# Altium PCB PCB1.PcbDoc (part 2 of 4)
Units mm, origin at the board's own origin, x right, y up, seen from the top; angles counter-clockwise.
Board outline 125 x 60 mm, 4 copper layers (Top Copper, Top Ref, Botton Ref, Bottom Copper), stack 1.586 mm thick; 166 components, 89 nets, 449 pads, 336 vias.
Unrouted connection lines stored in the file: 10.
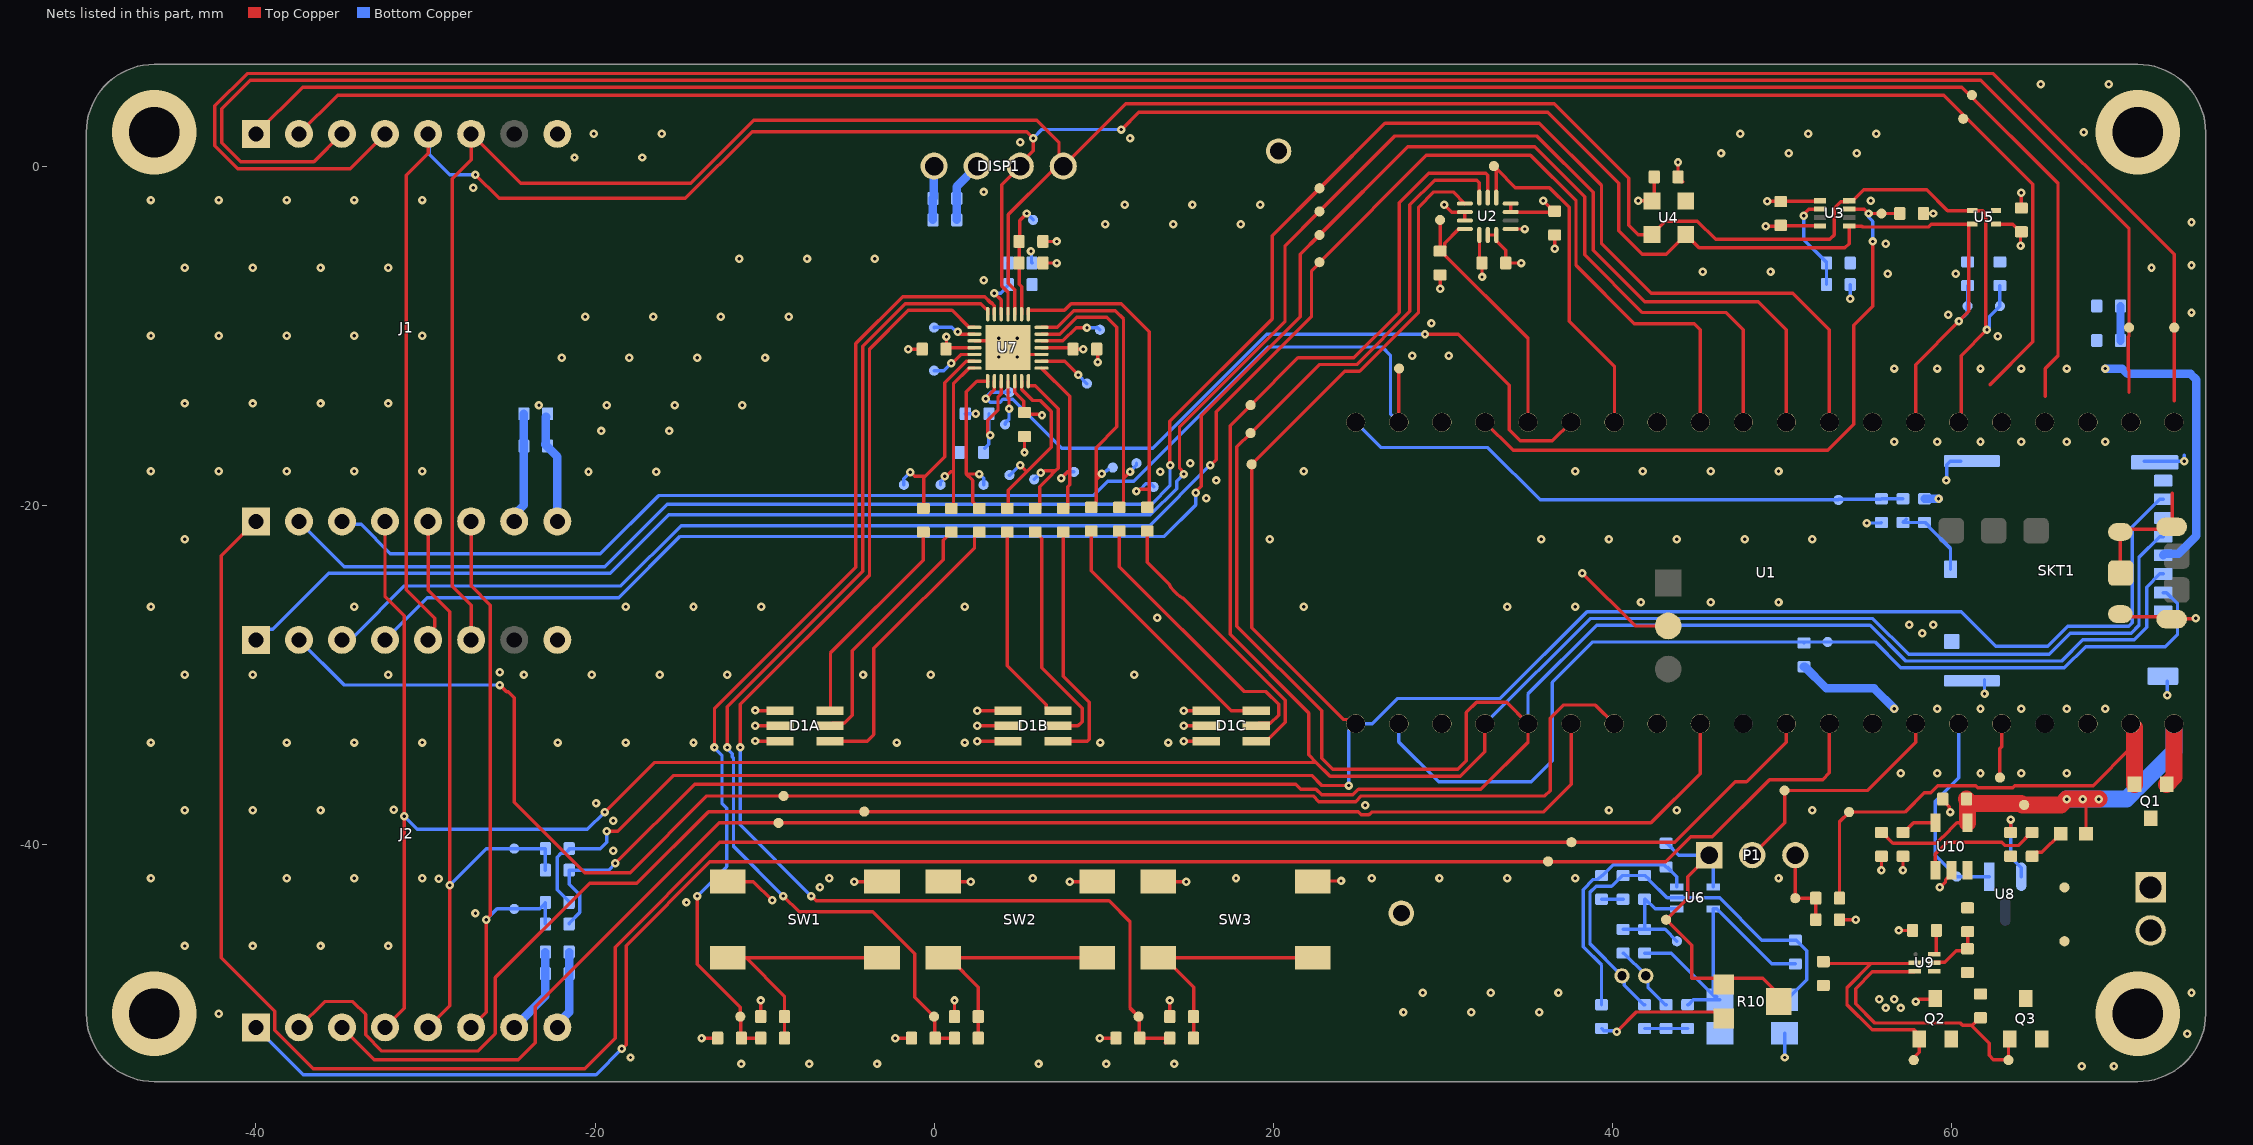
[diagram p4: the nets of this part, all layers, seen from the top]

## Part data
+3V3 ADC1 ADC2 ADC3 AMP_IN BTN1 BTN2 BTN3 COUT CS1 CS2 DOUT ICS IINT INT1 INT2 IO3 IO4 IO11 IO12 LB1 LB2 LB3 LG1 LG2 LG3 LR1 LR2 LR3 MB_MISO MB_MOSI MISO MOSI MOUT OINT OSCIO PWM1 PWM2 RST1 RST2 RX1 RX2 SCK SCL SCS SDA SINT SW SX_RST TX1 TX2 VBAT+ VBAT- VBUS VREF VSYS VSYSM: library part CMP-00028-00002-2, "0.6mm round", Pins=1
C1 C2 C3 C4 C5 C6 C7 C8 C11 C12 C13 C14 C15 C16 C17 C18 C19 C20 C21 C22 C23 C25 C26 C27: library part CMP-001-00085-1, "Multilayer Ceramic Capacitor, 0.1 uF, 16 V, ± 20%, X7R, 0603 [1608 Metric]", Case Code (Imperial)=0603, Case Code (Metric)=1608, Dielectric=X7R, Dielectric Material=Tantalum, Max Operating Temperature=125°C, Min Operating Temperature=-55°C, Package Quantity=4000, Tolerance=20%, Voltage Rating=16V, Case/Package=0603, Construction=Flat, Depth=0.8mm, Height=0.95mm, Lead Free="Lead Free", Length=1.6mm, Mounting Technology="Surface Mount", Packaging="Tape and Reel", RoHS Compliant=Yes, Series=VJ, Termination=SMD/SMT, Voltage Rating (DC)=16V, Width=0.8mm
C9: library part CMP-001-00088-1, "Multilayer Ceramic Capacitor, 100 pF, 50 V, ï¿½ 10%, C0G (NP0), 0603 [1608 Metric]", Case Code (Imperial)=0603, Case Code (Metric)=1608, Dielectric=C0G, Dielectric Material=Ceramic, Max Operating Temperature=125°C, Min Operating Temperature=-55°C, Package Quantity=1, Temperature Coefficient=30ppm/°C, Tolerance=10%, Voltage Rating=50V, Case/Package=0603, Construction=Flat, Depth=0.8mm, Dissipation Factor=0.1%, Height=0.8mm, Lead Free="Lead Free", Lead Pitch=0.7mm, Length=1.6mm, Material=Ceramic, Mounting Technology="Surface Mount,PCB", Packaging="Tape and Reel", Radiation Hardening=No, Reach SVHC Compliant=No, RoHS Compliant=Yes, Series=C, Termination=SMD/SMT, Thickness=0.034inch, Voltage Rating (DC)=50V, Width=0.031inch
C10: library part CMP-001-00087-1, "Multilayer Ceramic Capacitor, 10 uF, 6.3 V, ± 20%, X5R, 0603 [1608 Metric]", Case Code (Imperial)=0603, Case Code (Metric)=1608, Dielectric=X5R, Max Operating Temperature=85°C, Min Operating Temperature=-55°C, Package Quantity=4000, Tolerance=20%, Voltage Rating=6.3V, Case/Package=0603, Height=0.8mm, Lead Free="Lead Free", Length=1.6mm, Mounting Technology="Surface Mount", Packaging="Cut Tape", RoHS Compliant=Yes, Series=GRM, Termination=Standard, Voltage Rating (DC)=6.3V, Weight=0.000222oz, Width=0.8mm
C24: library part CMP-001-00084-1, "Multilayer Ceramic Capacitor, 0.01 uF, 50 V, ± 10%, X7R, 0603 [1608 Metric]", Case Code (Imperial)=0603, Case Code (Metric)=1608, Dielectric=X7R, Max Operating Temperature=125°C, Min Operating Temperature=-55°C, Package Quantity=1, Tolerance=10%, Voltage=50V, Case/Package=0603, Construction=Flat, Depth=0.8mm, Height=0.92mm, Lead Free="Lead Free", Length=1.6mm, Mounting Technology="Surface Mount", Packaging="Tape and Reel", Pins=2, Reach SVHC Compliant=Unknown, RoHS Compliant=Yes, Series=VJ, Termination=SMD/SMT, Thickness=0.036inch, Voltage Rating=50V, Voltage Rating (DC)=50V, Weight=7.1E-05oz, Width=0.031inch
C28 C29: library part CMP-001-00076-4, "Chip Capacitor, 4.7µF +/-20%, 10V, 0603, Thickness 1 mm", Case/Package=0603, Max Operating Temperature=85°C, Min Operating Temperature=-55°C, Tolerance=10%, Voltage Rating=10V, Mounting Technology=SMT, Pins=2
D1A D1B D1C: library part CMP-007-00036-1, "LED Tri-Color Blue/Green/Red 469nm/529nm/623nm Chip LED 6-Pin PLCC T/R", Case/Package=PLCC, Color=Blue,Green,Red, Forward Current=20mA, Forward Voltage=3.1V, Max Operating Temperature=100°C, Min Operating Temperature=-40°C, Package Quantity=2000, Reverse Voltage=4V, Contact Plating=Silver, Dominant Wavelength=469nm, Height=2mm, Length=3mm, Lens Size=2.3mm, Lens Style=Flat,Square,Diffused,Rectangular, Lens Transparency=Diffused, Luminous Intensity=384mcd, Mounting Technology="Surface Mount", Number of LEDs=3, Orientation="Top View", Packaging="Cut Tape", Pins=6, Reach SVHC Compliant=No, Series=-, Test Current=20mA, Viewing Angle=120°, Weight=40mg, Width=2.8mm
DISP1: library part CMP-003-00030-5, "0.96 Inch I2C OLED Display Module"
DS1: library part CMP-007-00004-2, "Chip LED, Red, 5 V, 25 mA, -40 to 85 degC, 2-Pin SMD (0603), RoHS, Tape and Reel", Case/Package=0603, Colour=Red, Forward Voltage=2.2V, Manufacturer="Everlight Electronics", Package Description="2-Pin Surface Mount Device, Body 1.6 x 0.8 mm", Datasheet URL=https://datasheet.ciiva.com/4688/el-19-217-r6c-al1m2vy-3tpdf-187026-4688713.pdf, Datasheet Version="Rev. 1, 01/2005", Lens Style=Clear, Manufacturer URL=http://www.everlight.com/, Mounting Technology=SM, Package Reference=0603, RoHS Compliant=False
J1 J2: library part CMP-002-00071-3, "MikroBus shield pico"
J3: library part CMP-002-00073-1, "Connector 250V AC/DC 5A 2P 1 Row PCB - Vertical Mounting Polyester White", Color=Beige, Contact Current Rating=5A, Flammability Rating="UL94 V-0", Housing Color=Natural, Max Operating Temperature=221°C, Min Operating Temperature=-67°C, Operating Supply Voltage=250V, Package Quantity=5000, Approvals=CSA, Backwall/Post Interruptions="No (Without)", Circuit Application=Signal, Connector System=Wire-to-Board, Connector Type=Connector,Pin,Plug,Header, Contact Material="Copper Alloy", Contact Mating Length=7.49mm, Contact Plating=Tin, Contact Post Length=3.56mm, Contact Retention="No (Without)", Contact Shape=Square, Contact Style=Straight, Current Rating=5A, Gender=Male, Height=7.87mm, Housing Material=Polyester, Lead Free="Lead Free", Length=7.62mm, Mating Alignment="No (Without)", Mating Connector Lock="Yes (With)", Mating Retention="No (Without)", Mounting Ears="No (Without)", Mounting Technology="Through Hole", Number of Contacts=2, Number of Positions=2, Number of Rows=1, Orientation=Straight, Panel Mount Retention="No (Without)", PCB Mount Alignment="No (Without)", PCB Mount Retention=Without, PCB Mounting Orientation=Vertical, PCB Thickness=0.063inch, Pitch=2.54mm, Plating=Tin, Plating Thickness=3.81um, Reach SVHC Compliant=Unknown, RoHS Compliant=Yes, Sealable="No (Without)", Series=MTA-100, Shrouded="No (Without)", Strain Relief="No (Without)", Tail Length=0.14inch, Termination=Solder, Voltage Rating=250V, Voltage Rating (AC)=250V, Voltage Rating (DC)=250V
L1 L2: library part CMP-006-00000-4, "IND, Chip Ferrite Bead, 330 Ohm, +/- 25%, 1.5 A, -55 to 125 degC, 0805 (2012 Metric), Tape and Reel", Case/Package=0805, Current Rating=1.5A, Manufacturer=Murata, Max Operating Temperature=125°C, Min Operating Temperature=-55°C, Package Description="2-Pin Surface Mount Device, Body 2 x1.25 mm", Package Quantity=4000, Resistance=90mohm, Tolerance=25%, Core Material=Ferrite, Datasheet URL=http://psearch.en.murata.com/inductor/product/LQG15HS15NJ02_.pdf, Datasheet Version=Nov-11, Impedance=330Ohm, Max Current Rating=1.5A, Mounting Technology=SM, Package Reference=0805, Packaging=TapeandReel, RoHS Compliant=True
MK1: library part CMP-010-000001-2, "4.0 mm, Omnidirectional, PCB Mount, 2.0 Vdc, Elecret Condenser Microphone", Clock Frequency=10kHz, Frequency=100Hz, Operating Supply Current=500uA, Operating Supply Voltage=2V, Package=None, Availability=Unavailable, Component Type=Standard, Design Item ID=CMEJ-0415-42-LP, Direction=Omnidirectional, Height=1.5mm, Length=4mm, MF="{'manufacturer': u'CUI'}", MP=CMEJ-0415-42-LP, Output Type=Analog, Pin Count=2, Price=None, Series=CMEJ, Shape=Circular, Source=CMEJ-0415-42-LP.SchLib, Termination="PC Pins", Voltage Rating=2V, Width=4mm
P1: library part CMP-002-00076-1, "KK 254 Breakaway Header Vertical 3 Circuits 0.38um Gold Selective Plating Mating Pin 6.09mm", Color=Black, Contact Resistance=20mR, Current Rating=4A, Flammability Rating="UL94 V-0", Max Operating Temperature=75°C, Max Voltage Rating (AC)=250V, Min Operating Temperature=0°C, Package Quantity=1, Contact Material=Brass,Bronze, Contact Mating Length=0.24inch, Contact Plating=Gold, Contact Type="Male Pin", Depth=2.49mm, Gender=Male, Glow Wire Compliant=Non-compliant, Housing Color=Black, Housing Material=Nylon, Lead Free="Lead Free", Max Voltage Rating (DC)=250V, Mounting Technology="Through Hole", Number of Circuits=3, Number of Contacts=3, Number of Positions=3, Number of Rows=1, Orientation=Straight, Packaging=Bulk, Pitch=2.54mm, Radiation Hardening=No, Reach SVHC Compliant=Unknown, RoHS Compliant=Yes, Series="KK® 42375", Termination=Solder, Voltage Rating=250V, Voltage Rating (DC)=250V
Q1: library part CMP-013-00034-1, "NTRV4101PT1G P-channel MOSFET Transistor; 1.7 A; 20 V; 3-Pin SOT-23", Case/Package=SOT-23-3, Continuous Drain Current (ID)=3.2A, Drain to Source Resistance=70mR, Drain to Source Voltage (Vdss)=20V, Gate to Source Voltage (Vgs)=8V, Input Capacitance=675pF, Max Operating Temperature=150°C, Max Power Dissipation=420mW, Min Operating Temperature=-55°C, Package Quantity=3000, Power Dissipation=1.25W, Element Configuration=Single, Fall Time=21ns, Height=1.01mm, Lead Free="Lead Free", Length=3.04mm, Number of Elements=1, Packaging="Tape and Reel", Pins=3, Polarity=P-CHANNEL, Radiation Hardening=No, Rds On Max=85mR, Rise Time=12.6ns, RoHS Compliant=Yes, Series=-, Turn-Off Delay Time=30.2ns, Turn-On Delay Time=7.5ns, Width=1.4mm
Q2 Q3: library part CMP-013-00035-1, "N-Channel 12 V 10 mO 50.6 nC SMT Enhancement Mode Mosfet - SC-59 (SOT-23)", Case/Package=TO-236-3, Continuous Drain Current (ID)=9.3A, Drain to Source Resistance=41mR, Drain to Source Voltage (Vdss)=12V, Gate to Source Voltage (Vgs)=4.5V, Input Capacitance=2.426nF, Max Operating Temperature=150°C, Max Power Dissipation=680mW, Min Operating Temperature=-55°C, Package Quantity=3000, Fall Time=16.8ns, Lead Free="Lead Free", Mounting Technology="Surface Mount", Number of Channels=1, Packaging="Tape and Reel", Polarity=N-CHANNEL, Rds On Max=10mR, Rise Time=57.6ns, RoHS Compliant=Yes, Series=-, Turn-Off Delay Time=22.2ns, Turn-On Delay Time=7.6ns, Weight=0.000282oz
R1 R2 R12 R13 R14 R15 R16 R19 R20 R26 R27 R28 R29 R30 R31 R41: library part CMP-009-00017-7, "Chip Resistor, 10 KOhm, +/- 1%, 01 W, -55 to 155 degC, 0603 (1608 Metric)", Case/Package=0603, Max Operating Temperature=155°C, Min Operating Temperature=-55°C, Power=100mW, Tolerance=1%, Voltage Rating=50V, Mounting Technology=SM, Pins=2, RoHS Compliant=True
R3 R4 R17 R18 R21 R22 R32 R34 R35 R36: library part CMP-009-00006-6, "Chip Resistor, 0 Ohm, 0.1 W, -55 to 155 degC, 0603 (1608 Metric)", Case/Package=0603, Max Operating Temperature=155°C, Min Operating Temperature=-55°C, Power=100mW, Tolerance=5%, Voltage Rating=50V, Mounting Technology=SM, Pins=2, RoHS Compliant=True
R5 R6 R9 R33: library part CMP-009-00014-6, "Chip Resistor, 1 KOhm, +/-1%, 0.1 W, -55 to 155 degC, 0603 (1608 Metric)", Case/Package=0603, Max Operating Temperature=155°C, Min Operating Temperature=-55°C, Power=100mW, Tolerance=1%, Voltage Rating=50V, Mounting Technology=SM, Pins=2, RoHS Compliant=True
R7 R8: library part CMP-009-00023-6, "Chip Resistor, 100 KOhm, +/- 1%, 0.1 W, -55 to 155 degC, 0603 (1608 Metric)", Case/Package=0603, Max Operating Temperature=155°C, Min Operating Temperature=-55°C, Power=100mW, Tolerance=1%, Voltage Rating=50V, Mounting Technology=SM, Pins=2, RoHS Compliant=True
R10: library part CMP-009-00187-1, "Cermet trimmer potentiometer, 100 kΩ, 0.1 W, SMD, on top, TC33X-2-104E", Max Operating Temperature=100°C, Max Power Dissipation=100mW, Min Operating Temperature=-40°C, Package Quantity=1, Resistance Tolerance=25%, Resistor Type=Carbon,Cermet, Temperature Coefficient=250ppm/°C, Voltage Rating (DC)=50V, Depth=3.8mm, Height=0.047inch, Length=0.15inch, Military Standard=Not, Mounting Technology="Surface Mount", Number of Turns=1, Packaging="Tape and Reel", Pins=2, Power Rating=100mW, Radiation Hardening=No, Reach SVHC Compliant=No, RoHS Compliant=Yes, Series=TC33, Termination="Foot Print", Tolerance=25%, Weight=29.4mg, Width=0.118inch
R11 R39: library part CMP-009-00186-1, "SMD Chip Resistor, 2.2 kOhm, ± 1%, 100 mW, 0603 [1608 Metric], Thick Film, General Purpose", Case Code (Imperial)=0603, Case Code (Metric)=1608, Max Operating Temperature=155°C, Max Power Dissipation=100mW, Min Operating Temperature=-55°C, Package Quantity=10, Ratings=AEC-Q200, Resistance Tolerance=1%, Resistor Type="Thick Film", Temperature Coefficient=100ppm/°C, Voltage Rating=75V, Case/Package=0603, Construction=Rectangular, Contact Plating=Tin, Depth=0.85mm, Features="Automotive AEC-Q200", Height=0.45mm, Lead Free="Lead Free", Length=1.55mm, Military Standard=Not, Number of Terminations=2, Packaging="Tape and Reel", Power Rating=100mW, Radiation Hardening=No, Reach SVHC Compliant=Unknown, RoHS Compliant=Yes, Series=CRCW, Technology="THICK FILM", Termination=SMD/SMT, Tolerance=1%, Voltage Rating (DC)=75V, Weight=7.1E-05oz, Width=0.033inch
R23A R23B R23C: library part CMP-009-00189-1, "Res Thick Film 0603 300 Ohm 5% 1/10W ±200ppm/°C Molded SMD Punched Carrier T/R", Case Code (Imperial)=0603, Case Code (Metric)=1608, Max Operating Temperature=155°C, Max Power Dissipation=100mW, Min Operating Temperature=-55°C, Package Quantity=1, Resistance Tolerance=5%, Resistor Type="Thick Film", Temperature Coefficient=200ppm/°C, Voltage Rating=75V, Case/Package=0603, Construction=Rectangular, Contact Plating=Tin, Depth=0.8mm, Features="Automotive AEC-Q200", Height=0.45mm, Lead Free="Lead Free", Length=1.6mm, Military Standard=Not, Mounting Technology="Surface Mount", Number of Terminations=2, Packaging="Tape and Reel", Pins=2, Power Rating=100mW, Radiation Hardening=No, Reach SVHC Compliant=Unknown, RoHS Compliant=Yes, Series=ERJ, Technology="THICK FILM", Termination=SMD/SMT, Tolerance=5%, Voltage Rating (DC)=75V, Weight=7.1E-05oz, Width=0.8mm
R24A R24B R24C R25A R25B R25C: library part CMP-009-00188-1, "SMD Chip Resistor, 100 Ohm, ï¿½ 1%, 100 mW, 0603 [1608 Metric], Thick Film, Precision", Case Code (Imperial)=0603, Case Code (Metric)=1608, Max Operating Temperature=155°C, Max Power Dissipation=100mW, Min Operating Temperature=-55°C, Package Quantity=5000, Resistance Tolerance=1%, Resistor Type="Thick Film", Temperature Coefficient=100ppm/°C, Voltage Rating=75V, Case/Package=0603, Construction=Rectangular, Contact Plating=Tin, Depth=0.8mm, Features="Automotive AEC-Q200", Height=0.45mm, Lead Free="Lead Free", Length=1.6mm, Military Standard=Not, Mounting Technology="Surface Mount", Number of Terminations=2, Packaging="Tape and Reel", Power Rating=100mW, Radiation Hardening=No, Reach SVHC Compliant=No, RoHS Compliant=Yes, Series=ERJ, Termination=SMD/SMT, Tolerance=1%, Voltage Rating (DC)=75V, Weight=7.1E-05oz, Width=0.8mm
R37: library part CMP-009-00184-1, "SMD Chip Resistor, 330 Ohm, ± 1%, 100 mW, 0603 [1608 Metric], Thick Film, Precision", Case Code (Imperial)=0603, Case Code (Metric)=1608, Current Rating=500mA, Max Operating Temperature=155°C, Max Power Dissipation=100mW, Min Operating Temperature=-55°C, Package Quantity=5000, Resistance Tolerance=1%, Resistor Type="Thick Film", Temperature Coefficient=100ppm/°C, Voltage Rating=75V, Case/Package=0603, Construction=Rectangular, Contact Material=Copper, Contact Plating=Tin, Depth=0.8mm, Features="Automotive AEC-Q200", Gender=Male, Height=0.45mm, Lead Free="Lead Free", Lead Pitch=1.1mm, Length=1.6mm, Military Standard=Not, Mounting Technology="Surface Mount", Number of Terminations=2, Packaging="Tape and Reel", Pins=2, Power Rating=100mW, Radiation Hardening=No, Reach SVHC Compliant=No, RoHS Compliant=Yes, Series=ERJ, Termination=SMD/SMT, Tolerance=1%, Voltage Rating (DC)=75V, Weight=7.1E-05oz, Width=0.8mm
R38: library part CMP-009-00182-1, "Res Thick Film 0603 470 Ohm 5% 0.1W(1/10W) ±200ppm/°C Pad SMD Automotive T/R", Case Code (Imperial)=0603, Case Code (Metric)=1608, Max Operating Temperature=155°C, Max Power Dissipation=100mW, Min Operating Temperature=-55°C, Package Quantity=5000, Ratings=AEC-Q200, Resistance Tolerance=5%, Resistor Type="Thick Film", Temperature Coefficient=200ppm/°C, Voltage Rating=75V, Case/Package=0603, Construction=Rectangular, Contact Plating=Tin, Depth=0.85mm, Features="Automotive AEC-Q200", Height=0.45mm, Lead Free="Lead Free", Length=1.55mm, Military Standard=Not, Number of Terminations=2, Packaging="Tape and Reel", Power Rating=100mW, Radiation Hardening=No, Reach SVHC Compliant=Unknown, RoHS Compliant=Yes, Series=CRCW, Technology="THICK FILM", Termination=SMD/SMT, Tolerance=5%, Weight=7.1E-05oz, Width=0.85mm, Working Voltage=75V
R40: library part CMP-009-00181-1, "SMD Chip Resistor, 2 kOhm, ï¿½ 1%, 100 mW, 0603 [1608 Metric], Thick Film, Precision", Case Code (Imperial)=0603, Case Code (Metric)=1608, Max Operating Temperature=155°C, Max Power Dissipation=100mW, Min Operating Temperature=-55°C, Package Quantity=1, Resistance Tolerance=1%, Resistor Type="Thick Film", Temperature Coefficient=100ppm/°C, Voltage Rating=75V, Voltage Rating (DC)=50V, Case/Package=0603, Construction=Rectangular, Contact Plating=Tin, Depth=0.8mm, Features="Automotive AEC-Q200", Height=0.022inch, Lead Free="Lead Free", Length=1.6mm, Military Standard=Not, Mounting Technology="Surface Mount", Number of Terminations=2, Packaging="Tape and Reel", Pins=2, Power Rating=100mW, Radiation Hardening=No, Reach SVHC Compliant=No, RoHS Compliant=Yes, Series=ERJ, Termination=SMD/SMT, Tolerance=1%, Width=0.8mm
R42 R43: library part CMP-009-00185-1, "Res Thick Film 0603 4.7M Ohm 5% 0.1W -400ppm/°C to 150ppm/°C Molded SMD Punched Carrier T/R", Case Code (Imperial)=0603, Case Code (Metric)=1608, Max Operating Temperature=155°C, Max Power Dissipation=100mW, Min Operating Temperature=-55°C, Package Quantity=1, Resistance Tolerance=5%, Resistor Type="Thick Film", Temperature Coefficient=150ppm/°C, Voltage Rating=75V, Voltage Rating (DC)=50V, Case/Package=0603, Construction=Rectangular, Contact Plating=Tin, Depth=0.8mm, Features="Automotive AEC-Q200", Height=0.45mm, Lead Free="Lead Free", Length=1.6mm, Military Standard=Not, Mounting Technology="Surface Mount", Number of Terminations=2, Packaging="Tape and Reel", Power Rating=100mW, Reach SVHC Compliant=Unknown, RoHS Compliant=Yes, Series=ERJ, Technology="THICK FILM", Termination=SMD/SMT, Tolerance=5%, Weight=7.1E-05oz, Width=0.8mm
SKT1: library part CMP-002-00049-5, "Micro SD Card Connector, Pitch 1.1 mm, 8 Position, Height 1.4 mm, -25 to 85 degC, RoHS, Tape and Reel", Pins=14
SW1 SW2 SW3: library part CMP-011-00013-1, "Switch Tactile OFF (ON) SPST Round Button Gull Wing 0.05A 12VDC 1.57N SMD Loose Piece", Case/Package=SMD/SMT, Color=Black, Contact Current Rating=50mA, Insulation Resistance=100MR, Max Operating Temperature=85°C, Min Operating Temperature=-35°C, Operating Force=1.57N, Package Quantity=750, Voltage Rating=24V, Actuator Length=1.4mm, Actuator Material=Polyphenylene, Actuator Type=Standard, Contact Material="Copper Alloy,Silver", Contact Plating=Silver, Current Rating=50mA, Depth=10mm, ELV=Compliant, Illumination Type=Non-Illuminated,Illuminated, Lead Free="Lead Free", Length=6mm, Max Current Rating=50mA, Mechanical Life=100000Cycles, Mounting Technology="Surface Mount", Orientation=Straight, Packaging=Bulk, Reach SVHC Compliant=Unknown, RoHS Compliant=Yes, Series=FSMJSMA, Switch Function=Off-Mom, Switch Travel=0.25mm, Termination="Gull Wing", Throw Configuration=SPST, Voltage Rating (DC)=24V, Width=6mm
TP1 TP2: library part CMP-002-00037-2, "Test Point, Orange, Height 4.6 mm, Tail Length 3 mm, 1-Pin THD, RoHS", Colour=Orange, Manufacturer=Keystone, Package Description="1-Pin Through Hole Device, Dia 2.54 mm", Package Quantity=10, Case/Package=5003, Connector Type=TestPoint, Contact Material=Bronze, Contact Plating=Tin, Datasheet URL=http://keyelco.com/userAssets/file/M65p56.pdf, Datasheet Version=Jun-15, Diameter=2.54mm, Manufacturer URL=http://www.keyelco.com/, Mounting Technology=TH, Package Reference=5003, Packaging=Bulk, Pins=1, RoHS Compliant=True
U1: library part CMP-006-000001-6, "Raspberry Pi Pico W RP2040", Manufacturer="Raspberry Pi", Package=None, Availability="In Stock", Check_prices=https://www.snapeda.com/parts/SC0918/Raspberry+Pi/view-part/?ref=eda, Component Type=Standard, Design Item ID=SC0918, Manufacturer Part Number=SC0918, MF="Raspberry Pi", MP=SC0918, Pin Count=53, Price=None, Purchase-URL=https://pricing.snapeda.com/search/part/SC0918/?ref=eda, SnapEDA_Link=https://www.snapeda.com/parts/SC0918/Raspberry+Pi/view-part/?ref=snap, Source=SC0918.SchLib
U2: library part CMP-010-00032-3, "Mems Module, 1.71-3.6 V, Lga-14 Rohs Compliant: Yes", Min Operating Temperature=-40°C, Length=2.5mm, Width=3mm
U3: library part CMP-010-00031-2, "High-speed high-precision digital ambient light sensor (ALS) 8-SOT-5X3 -40 to 85", Height=600um, Length=2.1mm, Pins=8, Thickness=550um, Width=1.2mm
U4: library part CMP-010-00027-2, "Pressure Sensor, Barometric, 300 mbar, 1200 mbar, QFN, 8, -40 C", Case/Package=QFN, Max Operating Temperature=85°C, Max Supply Voltage=3.6V, Min Operating Temperature=-40°C, Min Supply Voltage=1.8V, Supply Current=20.09uA, Height=1mm, Lead Free="Lead Free", Packaging="Cut Tape", Pins=8, Pressure Type=Barometric, Reach SVHC Compliant=No, RoHS Compliant=Yes
U5: library part CMP-010-00033-3, "Humidity And Temperature Sensor"
U6: library part CMP-00027-00002-4, "Audio Amp Microphone 1-CH Mono Class-AB 5-Pin SC-70 T/R", Max Operating Temperature=85°C, Max Supply Voltage=5.5V, Min Operating Temperature=-40°C, Min Supply Voltage=2.4V, Power Supply Rejection Ratio (PSRR)=112dB, Gain Bandwidth Product=600kHz, Mounting Technology="Surface Mount", Packaging="Tape and Reel", Radiation Hardening=No, RoHS Compliant=No, Series=-
U7: library part CMP-016-00011-5, "IC Gpio Expander I2C 16CH 28QFN / I2C Interface 5.5V 28-PIN Qfn-ut Ep T/r", Case/Package=QFN, Frequency=400kHz, Max Operating Temperature=85°C, Min Operating Temperature=-40°C, Interface=I2C, Lead Free="Lead Free", Mounting Technology="Surface Mount", Number of I/Os=16, Packaging="Cut Tape", Pins=28, RoHS Compliant=Yes, Series=-
U8: library part CMP-004-00033-1, "LM4040 Series 2.5 V ±1 % Precision Micropower Shunt Voltage Reference - SOT-23", Case/Package=SOT-23, Cathode Current=70uA, Current Rating=15mA, Max Operating Temperature=85°C, Max Output Voltage=2.5V, Min Operating Temperature=-40°C, Output Voltage=10V, Package Quantity=3000, Supply Current=500nA, Temperature Coefficient=150ppm/°C, Tolerance=1%, Height=1.01mm, Lead Free="Lead Free", Length=2.92mm, Max Output current=15mA, Min Output Voltage=2.5V, Mounting Technology="Surface Mount", Output Current=15mA, Output Type=Fixed, Packaging="Tape and Reel", Pins=3, Radiation Hardening=No, Reach SVHC Compliant=No, Reference Type=Shunt, Reference Voltage=2.5V, RoHS Compliant=Yes, Series=-, Width=1.3mm
U9: library part CMP-001-0002-1, "Li-Ion/Li Polymer Advanced Single-Cell Battery Protector IC Family 6-WSON -40 to 85", Case/Package=WFDFN, Max Operating Temperature=85°C, Min Operating Temperature=-40°C, Operating Supply Voltage=8V, Package Quantity=3000, Contact Plating=Gold, Fault Protection="Over Current,Short Circuit,Over/Under Voltage", Height=800um, Lead Free="Lead Free", Length=1.5mm, Mounting Technology="Surface Mount", Number of Cells=1, Packaging="Tape and Reel", Pins=6, RoHS Compliant=Yes, Series=-, Thickness=750um, Weight=0.000342oz, Width=1.5mm
U10: library part CMP-001-0001-1, "MCP73831 Series Single-Cell Li-Ion/Li-Polymer Battery Charge Controller SOT-23-5", Battery Pack Voltage=4.2V, Case/Package=SOT-23, Drain to Source Resistance=350mR, Max Charge Current=500mA, Max Operating Temperature=85°C, Max Output Voltage=4.5V, Max Power Dissipation=1.54W, Max Supply Voltage=6V, Min Operating Temperature=-40°C, Min Output Voltage=4.168V, Min Supply Voltage=3.75V, Voltage Rating=4.534V, Fault Protection="Over Voltage", Height=1.3mm, Lead Free="Lead Free", Length=3.1mm, Mounting Technology="Surface Mount", Number of Cells=1, Number of Channels=1, Number of Outputs=1, Output Current=500mA, Output Voltage=4.2V, Packaging="Tape and Reel", Pins=5, Radiation Hardening=No, Reach SVHC Compliant=No, RoHS Compliant=Yes, Series=-, Termination=SMD/SMT, Weight=0.00709oz, Width=1.8mm

## Via types
v1: diameter 0.5, hole 0.2, Top Copper to Bottom Copper, tented both sides, 328 vias
v2: diameter 3.2, hole 2.5, Top Copper to Bottom Copper, 4 vias
v3: diameter 5, hole 3, Top Copper to Bottom Copper, 4 vias

## Nets (pads, with @x,y where several pads share a name; then routed paths per layer and width w, separated by ;. In a path a pad name is that pad's centre, name@x,y a point inside that pad or via, vN(x,y) a via of type N, cw(c..) or ccw(c..) an arc to the next point about the centre after c; other vN are vias at no path point)
+3V3: +3V3.1 C1.1 C2.1 C3.1 C4.2 C5.2 C11.2 C12.2 C13.2 C18.2 C19.2 C20.2 C21.2 C22.2 C23.2 C25.2 C26.2 D1A.4 D1A.5 D1A.6 D1B.4 D1B.5 D1B.6 D1C.4 D1C.5 D1C.6 DISP1.2 J1.7 J2.7 L1.1 R1.2 R2.2 R3.2 R12.2 R14.2 R16.2 R17.1 R18.1 R19.2 R26.1 R28.1 R29.2 R30.2 SKT1.4 U1.36 U2.5 U2.8 U3.1 U4.1 U5.3 U7.4 U7.12 U7.18 | length 78.9
  Top Copper w0.2: v1@-10.535,-33.915 D1A.6@-9.354,-33.915 ; v1@-10.535,-33.015 D1A.5@-9.354,-33.015 ; v1@-10.535,-32.115 D1A.4@-9.354,-32.115 ; R12.2@-10.225,-50.165 v1(-10.225,-49.214) ; v1(0.731,-10.064) 0.731,-10.764 C11.2@0.7,-10.795 0.785,-10.71 U7.4@2.385,-10.71 ; R14.2@1.205,-50.165 v1(1.205,-49.214) ; v1@2.551,-33.92 D1B.6@3.732,-33.92 ; v1@2.551,-33.02 D1B.5@3.732,-33.02 ; v1@2.551,-32.12 D1B.4@3.732,-32.12 ; U7.12@4.76,-12.685 4.76,-13.341 5.29,-13.872 5.29,-14.496 5.437,-14.643 6.308,-14.643 v1(6.366,-14.7) ; U7.18@6.335,-10.71 8.105,-10.71 C13.2@8.19,-10.795 v1(8.81,-10.795) ; R16.2@6.415,-4.445 v1(7.239,-4.445) ; R19.2@13.905,-50.165 v1(13.905,-49.214) ; v1@14.74,-33.917 D1C.6@15.916,-33.917 ; v1@14.743,-33.02 D1C.5@15.924,-33.02 ; v1@14.743,-32.12 D1C.4@15.924,-32.12 ; v1(29.845,-7.239) R1.2@29.845,-6.415 ; U2.5@32.16,-4.06 32.17,-4.07 32.17,-5.565 C2.1@32.32,-5.715 v1(32.32,-6.539) ; U2.8@34.01,-3.71 v1(34.834,-3.71) ; v1(36.605,-4.884) C3.1@36.605,-4.06 ; v1(41.529,-2.032) 42.324,-2.032 U4.1@42.336,-2.044 42.48,-1.9 C4.2@42.48,-0.635 ; v1(49.141,-2.065) C1.1@49.965,-2.065 ; C1.1@49.94,-2.09 C1.1@49.965,-2.065 ; U3.1@52.255,-2.04 52.23,-2.065 C1.1@49.965,-2.065 ; R2.2@58.358,-2.794 v1(58.928,-2.794) ; U5.3@62.64,-3.425 63.635,-3.425 C5.2@64.085,-3.875 ; +3V3.1@62.865,-35.814 62.865,-34.35 62.972,-34.243 U1.36@62.972,-32.887 ; v1(64.085,-4.699) C5.2@64.085,-3.875 ; C5.2@64.135,-3.875 C5.2@64.085,-3.875
  Bottom Copper w0.5: J2.7@-24.765,-50.8 -22.925,-48.96 C21.2@-22.925,-47.625 C20.2@-22.925,-46.355 ; J1.7@-24.765,-20.955 -24.765,-20.562 -24.195,-19.992 C23.2@-24.195,-16.51 C22.2@-24.195,-14.605 ; C25.2@1.335,-3.175 C26.2@1.335,-1.905 1.335,-1.205 DISP1.2@2.54,0 ; R28.1@51.308,-29.529 51.358,-29.529 52.635,-30.807 55.445,-30.807 v1(56.642,-32.004) ; R26.1@58.42,-19.62 v1(59.247,-19.62) ; v1(69.088,-11.938) 70.073,-11.938 70.395,-12.26 74.116,-12.26 74.45,-12.594 74.45,-21.816 73.413,-22.853 72.594,-22.853 SKT1.4@72.494,-22.953
  other v1: 57.023,-35.814 59.182,-35.814 61.722,-35.814 64.135,-35.814 66.802,-35.814 -10.541,-33.909 2.545,-33.914 14.737,-33.914 -10.541,-33.009 2.545,-33.014 14.737,-33.014 -10.541,-32.109 2.545,-32.114 14.737,-32.114 59.182,-32.004 61.722,-32.004 64.135,-32.004 66.802,-32.004 69.088,-32.004 56.642,-16.256 59.182,-16.256 61.722,-16.256 64.135,-16.256 66.802,-16.256 69.088,-16.256 56.642,-11.938 59.182,-11.938 61.722,-11.938 64.135,-11.938 66.802,-11.938
+3V3A: C6.2 L1.2 R5.2 R7.2 U6.5 | length 18.8
  Bottom Copper w0.2: R7.2@41.91,-46.42 43.475,-46.42 46.04,-48.985 46.16,-48.985 45.965,-48.79 U6.5@45.965,-43.815 46.165,-43.815 49.405,-47.055 C6.2@50.8,-47.055 ; R5.2@44.45,-49.465 44.5,-49.465 44.785,-49.18 L1.2@46.355,-49.18
AGND: C6.1 C7.1 C10.1 L2.1 MK1.N R8.1 U6.2 | length 26.6
  Bottom Copper w0.2: C7.1@41.91,-49.465 41.86,-49.465 40.709,-48.314 40.709,-47.894 MK1.N@40.575,-47.76 38.69,-45.875 38.69,-42.839 39.054,-42.475 39.96,-42.475 40.59,-41.845 C10.1@40.64,-41.845 R8.1@41.91,-41.845 41.96,-41.845 42.19,-42.075 42.19,-42.125 43.23,-43.165 U6.2@43.815,-43.165 46.339,-43.165 48.829,-45.655 C6.1@50.8,-45.655 50.85,-45.655 51.48,-46.285 51.48,-47.985 50.285,-49.18 L2.1@50.165,-49.18
AMP_IN: AMP_IN.1 C8.2 R7.1 R8.2 U6.1 | length 7.4
  Bottom Copper w0.2: C8.2@40.64,-45.02 R7.1@41.91,-45.02 ; AMP_IN.1@43.815,-45.72 43.115,-45.02 R7.1@41.91,-45.02 ; U6.1@43.815,-43.815 42.53,-43.815 41.96,-43.245 R8.2@41.91,-43.245 R7.1@41.91,-45.02
BTN_1: BTN1.1 C14.2 R13.2 U7.27 | length 57.7
  Top Copper w0.2: v1(-13.97,-43.053) -13.97,-47.074 -11.43,-49.614 BTN1.1@-11.43,-50.165 -11.398,-50.197 -11.398,-51.402 C14.2@-11.365,-51.435 ; v1(-12.954,-34.29) -12.954,-32.004 -4.61,-23.66 -4.61,-10.464 -1.855,-7.709 2.994,-7.709 3.328,-8.043 3.359,-8.043 3.56,-8.244 U7.27@3.56,-8.735 ; C14.2@-11.365,-51.485 C14.2@-11.365,-51.435 ; R13.2@-10.225,-51.435 C14.2@-11.365,-51.435
  Bottom Copper w0.2: v1(-13.97,-43.053) -12.23,-41.313 -12.23,-37.868 -12.511,-37.587 -12.511,-34.749 -12.954,-34.306 v1(-12.954,-34.29)
BTN_2: BTN2.1 C15.2 R15.2 U7.28 | length 61.8
  Top Copper w0.2: v1(-12.192,-34.29) -12.192,-31.877 -4.21,-23.895 -4.21,-10.629 -1.69,-8.109 2.754,-8.109 3.055,-8.41 3.16,-8.41 U7.28@3.16,-8.735 ; v1(-8.89,-43.053) -7.952,-43.991 -3.605,-43.991 -1.143,-46.453 -1.143,-49.022 BTN2.1@0,-50.165 0.032,-50.197 0.032,-51.402 C15.2@0.065,-51.435 ; C15.2@0.065,-51.485 C15.2@0.065,-51.435 ; R15.2@1.205,-51.435 C15.2@0.065,-51.435
  Bottom Copper w0.2: v1(-12.192,-34.29) -12.192,-34.371 -11.911,-34.652 -11.911,-34.848 -11.83,-34.929 -11.83,-40.113 v1(-8.89,-43.053)
BTN_3: BTN3.1 C17.2 R20.2 U7.1 | length 73.4
  Top Copper w0.2: v1(-11.43,-34.29) -11.43,-31.75 -3.81,-24.13 -3.81,-10.795 -1.524,-8.509 1.059,-8.509 U7.1@2.06,-9.51 ; v1(-7.239,-43.053) -6.961,-43.331 10.321,-43.331 11.557,-44.567 11.557,-49.657 BTN3.1@12.065,-50.165 12.098,-50.198 12.098,-51.402 C17.2@12.13,-51.435 R20.2@13.905,-51.435 13.905,-51.485 13.675,-51.715 R20.2@13.625,-51.715 ; U7.1@2.14,-9.51 U7.1@2.385,-9.51
  Bottom Copper w0.2: v1(-11.43,-34.29) -11.43,-38.862 v1(-7.239,-43.053)
CS: R28.2 SCS.1 SKT1.2 U1.22 | length 58.5
  Bottom Copper w0.2: U1.22@27.412,-32.887 27.412,-33.967 29.767,-36.322 35.222,-36.322 36.472,-35.072 36.472,-30.457 38.862,-28.067 R28.2@51.308,-28.067 ; R28.2@51.308,-28.129 51.37,-28.067 55.499,-28.067 57.023,-29.591 59.159,-29.591 59.161,-29.593 60.897,-29.593 60.899,-29.591 66.675,-29.591 67.923,-28.343 72.622,-28.343 73.344,-27.621 73.344,-25.803 72.694,-25.153 SKT1.2@72.494,-25.153
DET_SW: C24.2 R27.2 SW.1 U1.20 | length 34.2
  Bottom Copper w0.2: U1.20@24.872,-15.107 26.365,-16.6 32.666,-16.6 35.751,-19.685 SW.1@53.34,-19.685 53.372,-19.653 55.848,-19.653 C24.2@55.88,-19.62 R27.2@57.15,-19.62
GND: C1.2 C2.2 C3.2 C4.1 C5.1 C11.1 C12.1 C13.1 C14.1 C15.1 C16.1 C17.1 C18.1 C19.1 C20.1 C21.1 C22.1 C23.1 C24.1 C25.1 C26.1 C28.1 C29.1 DISP1.1 J1.8 J1.9 J2.8 J2.9 L2.2 Q2.3 R4.2 R21.2 R22.2 R33.1 R39.1 R40.1 R41.1 R43.1 SKT1.6 SKT1.10 SKT1.11 SKT1.12 SKT1.13 SKT1.14 SW1.3 SW1.4 SW2.3 SW2.4 SW3.3 SW3.4 TP1.1 TP2.1 U1.3 U1.8 U1.13 U1.18 U1.23 U1.28 U1.33 U1.38 U1.A U1.B U1.C U1.D U1.F U1.TP1 U2.2 U2.3 U2.6 U2.7 U2.10 U2.11 U3.4 U4.4 U5.4 U7.3 U7.17 U7.29 U8.2 U10.2 | length 91.9
  Top Copper w0.2: v1(-13.716,-51.435) C14.1@-12.765,-51.435 ; SW1.4@-12.17,-42.2 -10.653,-42.2 v1(-9.54,-43.313) ; v1(-4.707,-42.2) SW1.3@-3.07,-42.2 ; v1(-2.286,-51.435) C15.1@-1.335,-51.435 ; v1(-1.524,-10.795) C11.1@-0.7,-10.795 ; SW2.4@0.53,-42.2 v1(2.167,-42.2) ; U7.3@2.385,-10.31 3.66,-10.31 v1(3.81,-10.16) ; v1(4.91,-11.26) 5.06,-11.11 U7.17@6.335,-11.11 ; v1(5.334,-16.891) C12.1@5.334,-16.067 ; C16.1@6.415,-5.715 v1(7.239,-5.715) ; v1(7.993,-42.2) SW2.3@9.63,-42.2 ; v1(9.652,-11.557) C13.1@9.652,-10.733 ; v1(9.779,-51.435) C17.1@10.73,-51.435 ; SW3.4@13.23,-42.2 v1(14.867,-42.2) ; SW3.3@22.33,-42.2 22.366,-42.164 v1(24.003,-42.164) ; v1(30.099,-2.286) 30.523,-2.71 U2.2@31.31,-2.71 U2.3@31.31,-3.21 ; U2.6@32.66,-4.06 U2.7@33.16,-4.06 33.16,-4.41 33.72,-4.97 C2.2@33.72,-5.715 ; C2.2@33.782,-5.715 v1(34.634,-5.715) ; U2.11@34.01,-2.21 U2.10@34.01,-2.71 36.555,-2.71 C3.2@36.605,-2.66 36.555,-2.66 35.941,-2.046 v1(35.941,-2.032) ; v1(38.227,-24.003) 41.348,-27.124 U1.F@43.3,-27.124 ; v1(43.88,0.217) C4.1@43.88,-0.635 43.88,-0.685 44.11,-0.915 C4.1@44.16,-0.915 ; v1(49.059,-3.556) C1.2@49.911,-3.556 ; C1.2@49.965,-3.515 52.23,-3.515 U3.4@52.255,-3.54 ; R33.1@53.532,-44.45 v1(54.356,-44.45) ; v1(55.88,-41.529) R41.1@55.88,-40.705 ; v1(56.896,-45.085) R39.1@57.72,-45.085 ; v1(57.15,-41.529) R40.1@57.15,-40.705 ; v1@58.039,-49.149 58.912,-49.149 Q2.3@59.055,-49.292 ; v1(59.309,-42.545) 59.324,-42.545 59.66,-42.209 59.66,-42.102 59.777,-41.985 59.81,-41.985 60.01,-41.785 U10.2@60.01,-41.535 ; C29.1@59.498,-37.338 59.498,-37.388 59.887,-37.776 59.887,-38.043 v1(59.944,-38.1) ; U5.4@62.64,-2.625 U5.4@62.69,-2.575 ; C28.1@63.5,-39.305 v1(63.5,-38.542) ; C5.1@64.035,-2.575 C5.1@64.135,-2.475 ; C5.1@64.135,-2.413 v1(64.135,-1.561) ; U1.D@69.97,-26.425 70.12,-26.575 72.85,-26.575 U1.B@73,-26.725 73.027,-26.698 74.394,-26.698 v1(74.422,-26.67) ; U1.TP1@69.97,-24.03 U1.TP1@70,-24 69.97,-23.97 U1.C@69.97,-21.575 70.12,-21.425 72.85,-21.425 73.025,-21.25 73.025,-19.304
  Bottom Copper w0.2: R21.2@1.84,-14.605 v1(2.46,-14.605) ; v1(5.715,-5.023) 5.748,-5.056 5.748,-5.683 R22.2@5.78,-5.715 ; v1(50.165,-52.578) L2.2@50.165,-51.15 ; v1(54.04,-7.812) R4.2@54.04,-6.985 ; v1(55.022,-21.051) 55.849,-21.051 C24.1@55.88,-21.02 ; v1(59.691,-18.542) 59.733,-18.5 59.733,-17.614 59.948,-17.399 SKT1.12@60.562,-17.399 ; v1(61.96,-31.132) SKT1.13@61.96,-30.305 ; v1(63.5,-38.542) 63.5,-40.751 64.13,-41.381 U8.2@64.13,-41.91 ; SKT1.11@71.374,-17.399 v1(73.75,-17.399) 73.75,-17.042 ; v1(72.74,-31.212) SKT1.14@72.74,-30.385
  Bottom Copper w0.5: C23.1@-22.922,-16.433 -22.225,-17.13 J1.8@-22.225,-20.955 ; C23.1@-22.922,-16.383 -22.898,-16.359 -22.898,-14.794 C22.1@-22.873,-14.77 ; J2.8@-22.225,-50.8 -22.225,-50.608 -21.525,-49.908 C21.1@-21.525,-47.625 C20.1@-21.525,-46.355 ; C25.1@-0.065,-3.175 C26.1@-0.065,-1.905 -0.032,-1.873 -0.032,-0.032 DISP1.1@0,0 ; C18.1@69.98,-10.287 C19.1@69.98,-8.255
  other v1: 67.691,-53.086 69.596,-53.086 -11.366,-52.959 -7.366,-52.959 -3.366,-52.959 6.16,-52.959 10.16,-52.959 14.16,-52.959 -17.907,-52.578 73.914,-51.181 -42.191,-50 27.686,-49.911 31.686,-49.911 35.686,-49.911 56.134,-49.657 57.023,-49.657 57.912,-49.276 55.753,-49.149 56.642,-49.149 28.829,-48.768 32.829,-48.768 36.829,-48.768 74.168,-48.768 -44.191,-46 -40.191,-46 -36.191,-46 -32.191,-46 -27.051,-44.069 -14.605,-43.434 -6.731,-42.545 -29.21,-42.037 -46.191,-42 -38.191,-42 -34.191,-42 -30.191,-42 -6.191,-42 5.809,-42 17.809,-42 25.809,-42 29.809,-42 33.809,-42 37.809,-42 49.809,-42 -18.923,-40.386 -18.923,-38.608 -44.191,-38 -40.191,-38 -36.191,-38 39.809,-38 43.809,-38 51.809,-38 -31.877,-37.973 25.426,-37.7 -19.939,-37.592 -46.191,-34 -38.191,-34 -34.191,-34 -30.191,-34 -22.191,-34 -18.191,-34 -14.191,-34 -2.191,-34 1.809,-34 9.809,-34 13.809,-34 -44.191,-30 -40.191,-30 -32.191,-30 -24.191,-30 -20.191,-30 -16.191,-30 -12.191,-30 -4.191,-30 -0.191,-30 11.809,-30 -25.63,-29.845 58.293,-27.559 57.531,-27.051 58.928,-27.051 13.166,-26.643 -46.191,-26 -34.191,-26 -18.191,-26 -14.191,-26 -10.191,-26 1.809,-26 21.809,-26 33.809,-26 37.809,-26 41.696,-25.72 45.809,-25.736 49.809,-25.736 -44.191,-22 19.809,-22 35.809,-22 39.809,-22 43.809,-22 47.809,-22 51.809,-22 16.061,-19.59 16.637,-18.542 -20.384,-18.034 -16.384,-18.034 13.335,-18.034 -46.191,-18 -42.191,-18 -38.191,-18 -34.191,-18 -30.191,-18 21.809,-18 37.809,-18 41.809,-18 45.809,-18 49.809,-18 15.113,-17.526 -19.622,-15.621 -15.622,-15.621 -23.305,-14.097 -19.305,-14.097 -15.305,-14.097 -11.305,-14.097 -44.191,-14 -40.191,-14 -36.191,-14 -32.191,-14 -21.971,-11.303 -17.971,-11.303 -13.971,-11.303 -9.971,-11.303 3.81,-11.26 28.194,-11.176 30.353,-11.176 4.91,-10.16 62.738,-10.033 -46.191,-10 -42.191,-10 -38.191,-10 -34.191,-10 -30.191,-10 29.337,-9.271 -20.574,-8.89 -16.574,-8.89 -12.574,-8.89 -8.574,-8.89 59.817,-8.763 74.168,-8.636 2.921,-6.731 56.261,-6.35 60.261,-6.35 45.339,-6.223 49.339,-6.223 -44.191,-6 -40.191,-6 -36.191,-6 -32.191,-6 71.809,-6 74.168,-5.842 -11.493,-5.461 -7.493,-5.461 -3.493,-5.461 56.134,-4.572 10.097,-3.429 14.097,-3.429 18.097,-3.429 74.168,-3.302 11.24,-2.286 15.24,-2.286 19.24,-2.286 55.245,-2.032 -46.191,-2 -42.191,-2 -38.191,-2 -34.191,-2 -30.191,-2 2.921,-1.524 -27.178,-1.27 -21.209,0.508 -17.209,0.508 46.419,0.762 50.419,0.762 54.419,0.762 5.08,1.397 11.557,1.651 -20.066,1.905 -16.066,1.905 47.562,1.905 51.562,1.905 55.562,1.905 67.809,2 65.278,4.826 69.278,4.826
  other v3: -46,-50 71,-50 -46,2 71,2
GP0/MB1_TX: J1.13 TX1.1 U1.1 | length 143.2
  Top Copper w0.2: J1.13@-32.385,1.905 -34.436,-0.146 -41.07,-0.146 -42.418,1.202 -42.418,3.556 -40.513,5.461 62.484,5.461 73.152,-5.207 TX1.1@73.152,-9.525 73.152,-13.843
GP1/MB1_RX: J1.14 RX1.1 U1.2 | length 136.8
  Top Copper w0.2: J1.14@-34.925,1.905 -36.576,0.254 -40.904,0.254 -42.018,1.368 -42.018,3.39 -40.347,5.061 61.741,5.061 70.485,-3.683 70.485,-10.017 70.443,-10.059 70.443,-11.995 70.485,-12.037 70.485,-13.335
GP2/MB1_PWM: J1.16 PWM1.1 U1.4 | length 122.7
  Top Copper w0.2: J1.16@-40.005,1.905 -37.249,4.661 60.617,4.661 66.294,-1.016 66.294,-9.144 66.294,-11.176 65.532,-11.938 65.532,-13.589
GP3/MB1_INT: INT1.1 J1.15 U1.5 | length 118.3
  Top Copper w0.2: J1.15@-37.465,1.905 -35.179,4.191 55.88,4.191 59.563,4.191 60.833,2.921 64.815,-1.061 64.815,-10.369 62.283,-12.901
GP4/I2C0_SDA: DISP1.4 J1.11 J2.11 R30.1 SDA.1 U1.6 U3.8 U4.2 U5.1 U7.24 | length 160.9
  Top Copper w0.2: J2.11@-27.305,-27.94 -27.305,-25.908 -28.43,-24.783 -28.43,-0.744 -27.305,0.381 J1.11@-27.305,1.905 -24.384,-1.016 -14.351,-1.016 -10.626,2.709 6.054,2.709 7.366,1.397 7.366,0.254 DISP1.4@7.62,0 ; U7.24@4.76,-8.735 4.76,-7.28 4.385,-6.905 4.385,-2.854 6.852,-0.387 6.854,-0.387 7.241,0 DISP1.4@7.62,0 ; U1.6@60.432,-15.107 60.579,-14.961 60.579,-11.176 v1(62.103,-9.652) 62.04,-9.589 62.04,-2.806 61.859,-2.625 U5.1@61.24,-2.625 59.775,-2.625 58.547,-1.397 54.828,-1.397 54.185,-2.04 U3.8@53.975,-2.04 53.925,-2.09 53.491,-2.09 53.086,-2.495 53.086,-4.064 52.832,-4.318 46.101,-4.318 45.027,-3.244 43.136,-3.244 U4.2@42.336,-4.044 41.534,-4.044 40.969,-3.478 40.969,-0.71 36.576,3.683 11.303,3.683 DISP1.4@7.62,0
  Bottom Copper w0.2: v1(62.103,-9.652) 62.256,-9.499 62.256,-8.864 SDA.1@62.865,-8.255 R30.1@62.865,-7.05
GP5/I2C0_SCL: DISP1.3 J1.12 J2.12 R29.1 SCL.1 U1.7 U3.5 U4.3 U5.2 U7.25 | length 160.7
  Top Copper w0.2: J2.12@-29.845,-27.94 -29.845,-27.547 -29.464,-27.166 -29.464,-26.67 -31.135,-24.999 -31.135,-0.528 -29.845,0.762 J1.12@-29.845,1.905 ; v1(-27.051,-0.508) -25.654,-1.905 -14.674,-1.905 -10.737,2.032 5.461,2.032 v1(5.842,1.651) 5.842,0.908 5.08,0.146 DISP1.3@5.08,0 3.985,-1.095 3.985,-7.07 4.36,-7.446 U7.25@4.36,-8.735 ; v1(11.049,2.159) 11.062,2.159 12.078,3.175 36.195,3.175 40.386,-1.016 40.386,-3.81 41.765,-5.189 43.191,-5.189 U4.3@44.336,-4.044 45.118,-4.826 53.721,-4.826 53.975,-4.572 U3.5@53.975,-3.54 54.733,-3.54 54.787,-3.594 58.644,-3.594 58.813,-3.425 U5.2@61.09,-3.425 ; U1.7@57.892,-15.107 57.892,-11.704 v1(60.452,-9.144) 61.04,-8.556 61.04,-3.475 U5.2@61.09,-3.425 ; U5.2@61.24,-3.425 U5.2@61.09,-3.425
  Bottom Copper w0.2: J1.12@-29.845,1.905 -29.781,1.841 -29.781,0.698 -28.575,-0.508 v1(-27.051,-0.508) ; v1(5.842,1.651) 6.35,2.159 v1(11.049,2.159) ; v1(60.452,-9.144) 60.926,-8.67 60.926,-8.289 SCL.1@60.956,-8.259 ; SCL.1@60.96,-8.255 R29.1@60.96,-7.05
GP6/MB1_RST: J1.2 RST1.1 U1.9 | length 119.9
  Top Copper w0.2: v1(13.928,-17.653) 13.9,-17.625 13.9,-15.056 19.939,-9.017 19.939,-4.116 22.822,-1.232 26.595,2.54 35.687,2.54 39.37,-1.143 39.37,-4.572 42.291,-7.493 50.653,-7.493 52.812,-9.652 U1.9@52.812,-15.107
  Bottom Copper w0.2: J1.2@-37.465,-20.955 -34.798,-23.622 -19.417,-23.622 -15.734,-19.939 12.827,-19.939 13.913,-18.853 13.913,-17.668 v1(13.928,-17.653)
GP7/MB2_PWM: J2.16 PWM2.1 U1.10 | length 119.6
  Top Copper w0.2: v1(14.732,-18.161) 14.732,-18.08 14.478,-17.826 14.478,-15.367 20.701,-9.144 20.701,-4.699 PWM2.1@22.733,-2.667 27.178,1.778 35.56,1.778 38.87,-1.532 38.87,-4.961 41.91,-8.001 48.621,-8.001 50.272,-9.652 U1.10@50.272,-15.107
  Bottom Copper w0.2: J2.16@-40.005,-27.94 -39.378,-27.313 -38.997,-27.313 -35.706,-24.022 -19.11,-24.022 -15.662,-20.574 12.758,-20.574 14.313,-19.019 14.313,-18.58 v1(14.732,-18.161)
GP8/MB2_TX: J2.13 TX2.1 U1.11 | length 109.2
  Top Copper w0.2: v1(15.446,-19.256) 15.446,-19.174 15.748,-18.872 15.748,-14.732 21.59,-8.89 21.59,-5.207 TX2.1@22.733,-4.064 27.94,1.143 35.433,1.143 38.37,-1.794 38.37,-5.223 41.783,-8.636 46.716,-8.636 47.732,-9.652 U1.11@47.732,-15.107
  Bottom Copper w0.2: J2.13@-32.385,-27.94 -29.901,-25.456 -18.598,-25.456 -14.986,-21.844 13.589,-21.844 15.446,-19.987 v1(15.446,-19.256)
GP9/MB2_RX: J2.14 RX2.1 U1.12 | length 107
  Top Copper w0.2: v1(16.298,-17.653) 16.637,-17.314 16.637,-14.478 22.264,-8.851 22.264,-6.184 RX2.1@22.67,-5.779 ; RX2.1@22.743,-5.657 29.035,0.635 35.179,0.635 37.865,-2.051 37.865,-5.861 41.294,-9.29 44.83,-9.29 45.192,-9.652 U1.12@45.192,-15.107
  Bottom Copper w0.2: J2.14@-34.925,-27.94 -34.647,-27.662 -34.139,-27.662 -31.242,-24.765 -18.473,-24.765 -14.917,-21.209 12.714,-21.209 16.27,-17.653 v1(16.298,-17.653)
GP10/MOT_CSn: ICS.1 U1.14 U2.12 | length 21.2
  Top Copper w0.2: U2.12@33.16,-1.86 33.16,-0.248 33.02,-0.108 ICS.1@33.02,0 33.074,-0.054 33.214,-0.194 34.29,-1.27 36.301,-1.27 37.465,-2.434 37.465,-9.144 40.132,-11.811 40.132,-15.088 U1.14@40.112,-15.107
GP11/SX_INTn: SINT.1 U1.15 U7.9 | length 46.1
  Top Copper w0.2: v1(3.048,-13.716) 3.56,-13.204 U7.9@3.56,-12.685 ; v1(28.956,-9.906) 30.91,-9.906 33.93,-12.926 33.93,-15.561 34.577,-16.207 36.472,-16.207 U1.15@37.572,-15.107
  Bottom Copper w0.2: SINT.1@4.445,-13.335 3.348,-13.335 3.048,-13.635 v1(3.048,-13.716) 3.106,-13.716 3.315,-13.925 3.899,-13.925 4.064,-13.76 4.648,-13.76 7.525,-16.637 12.896,-16.637 19.627,-9.906 v1(28.956,-9.906)
GP12/ICM_INT1: IINT.1 R1.1 U1.16 U2.4 | length 16.2
  Top Copper w0.2: IINT.1@29.845,-3.175 R1.1@29.845,-5.015 R1.1@29.895,-5.015 ; U2.4@31.31,-3.71 30.96,-3.71 30.125,-4.545 30.125,-4.785 R1.1@29.895,-5.015 ; U1.16@35.032,-15.107 35.032,-10.153 R1.1@29.895,-5.015
GP13/OPT_INT: OINT.1 R2.1 U1.17 U3.7 | length 39.2
  Top Copper w0.2: U1.17@32.492,-15.107 34.149,-16.764 52.711,-16.764 54.25,-15.225 54.25,-9.387 55.372,-8.265 v1(55.372,-4.445) ; U3.7@53.975,-2.54 54.864,-2.54 v1(55.118,-2.794) OINT.1@55.88,-2.794 R2.1@56.958,-2.794
  Bottom Copper w0.2: v1(55.118,-2.794) 55.118,-3.01 55.372,-3.264 v1(55.372,-4.445)
GP14/MB1_CS: CS1.1 J1.3 U1.19 | length 75.2
  Top Copper w0.2: U1.19@27.412,-15.107 27.412,-11.958 CS1.1@27.432,-11.938
  Bottom Copper w0.2: J1.3@-34.925,-20.955 -34.748,-21.132 -33.8,-21.132 -32.072,-22.86 -19.685,-22.86 -16.256,-19.431 9.398,-19.431 10.245,-18.584 11.785,-18.584 19.701,-10.668 26.426,-10.668 26.919,-11.161 26.919,-14.614 U1.19@27.412,-15.107
GP16/SPI0_RX: MISO.1 R32.2 R35.2 SKT1.7 U1.21 U2.1 | length 155.5
  Top Copper w0.2: v1(-19.304,-39.243) -18.669,-39.243 -15.367,-35.941 22.283,-35.941 22.877,-36.535 v1(24.47,-36.535) ; U1.21@24.872,-32.887 24.624,-32.639 24.13,-32.639 18.733,-27.241 MISO.1@18.733,-17.59 24.219,-12.103 25.096,-12.103 28.575,-8.624 28.575,-2.413 29.464,-1.524 30.624,-1.524 U2.1@31.31,-2.21
  Bottom Copper w0.2: R35.2@-21.525,-43.434 -21.525,-43.384 -22.225,-42.684 -22.225,-40.757 -22.007,-40.539 -21.755,-40.539 -21.525,-40.309 R32.2@-21.525,-40.259 -19.685,-40.259 -19.304,-39.878 v1(-19.304,-39.243) ; v1(24.47,-36.535) 24.47,-33.29 U1.21@24.872,-32.887 25.857,-32.887 27.344,-31.4 33.397,-31.4 38.511,-26.286 60.595,-26.286 62.63,-28.321 65.681,-28.321 66.859,-27.143 70.456,-27.143 70.671,-26.928 70.671,-21.276 72.294,-19.653 SKT1.7@72.494,-19.653
GP18/SPI0_SCK: J1.4 J2.4 SCK.1 SKT1.5 U1.24 U2.13 | length 196.2
  Top Copper w0.2: J2.4@-32.385,-50.8 -31.259,-49.674 -31.259,-26.526 -32.385,-25.4 J1.4@-32.385,-20.955 ; v1(-19.431,-38.1) -16.51,-35.179 22.548,-35.179 ; U1.24@32.492,-32.887 32.492,-34.537 31.045,-35.985 23.354,-35.985 22.548,-35.179 ; U2.13@32.66,-1.86 32.66,-0.541 32.543,-0.424 29.167,-0.424 27.432,-2.159 27.432,-8.636 24.765,-11.303 21.463,-11.303 SCK.1@18.669,-14.097 17.46,-15.306 17.46,-27.62 22.098,-32.258 22.098,-34.729 22.548,-35.179
  Bottom Copper w0.2: v1(-31.242,-38.354) -30.48,-39.116 -20.447,-39.116 v1(-19.431,-38.1) ; U1.24@32.492,-32.887 38.694,-26.686 55.372,-26.686 57.477,-28.791 59.49,-28.791 59.492,-28.793 60.566,-28.793 60.568,-28.791 65.777,-28.791 67.025,-27.543 70.622,-27.543 71.071,-27.094 71.071,-23.076 72.294,-21.853 SKT1.5@72.494,-21.853
GP19/SPI0_TX: MOSI.1 R34.2 R36.2 SKT1.3 U1.25 U2.14 | length 172.4
  Top Copper w0.2: v1(-18.803,-41.129) -14.123,-36.449 21.336,-36.449 21.637,-36.75 22.526,-36.75 22.861,-37.085 24.698,-37.085 25.032,-36.75 32.253,-36.75 35.032,-33.972 U1.25@35.032,-32.887 33.768,-31.623 31.994,-31.623 31.392,-32.225 31.392,-35.072 30.879,-35.585 23.52,-35.585 22.86,-34.925 22.86,-32.131 17.86,-27.131 17.86,-16.557 MOSI.1@18.669,-15.748 22.714,-11.703 24.931,-11.703 28.067,-8.567 28.067,-2.286 29.529,-0.824 32.004,-0.824 32.16,-0.98 U2.14@32.16,-1.86
  Bottom Copper w0.2: R36.2@-21.525,-44.704 -21.525,-44.654 -20.895,-44.024 -20.895,-42.978 -21.525,-42.348 R34.2@-21.525,-41.529 -19.203,-41.529 v1(-18.803,-41.129) ; U1.25@35.032,-32.887 35.032,-31.135 39.081,-27.086 55.207,-27.086 57.312,-29.191 59.325,-29.191 59.327,-29.193 60.731,-29.193 60.733,-29.191 66.509,-29.191 67.757,-27.943 70.788,-27.943 71.52,-27.211 71.52,-24.827 72.294,-24.053 SKT1.3@72.494,-24.053
GP20/MB2_RST: J2.2 RST2.1 U1.26 | length 89.8
  Top Copper w0.2: J2.2@-37.465,-50.8 -35.941,-49.276 -34.29,-49.276 -33.528,-50.038 -33.528,-51.249 -32.58,-52.197 -26.924,-52.197 -25.89,-51.163 -25.89,-47.859 -20.323,-42.291 -17.526,-42.291 -13.306,-38.071 25.019,-38.071 25.198,-38.25 25.653,-38.25 25.804,-38.1 35.923,-38.1 37.572,-36.451 U1.26@37.572,-32.887
GP21/MB2_INT: INT2.1 J2.15 U1.27 | length 94.2
  Top Copper w0.2: v1(-25.63,-30.607) -25.221,-31.015 -25.119,-31.015 -24.765,-31.369 -24.765,-37.516 -20.602,-41.679 -17.93,-41.679 -13.401,-37.15 22.361,-37.15 22.695,-37.485 24.863,-37.485 25.198,-37.15 36.028,-37.15 36.338,-36.84 36.338,-32.566 37.117,-31.788 39.012,-31.788 U1.27@40.112,-32.887
  Bottom Copper w0.2: J2.15@-37.465,-27.94 -34.798,-30.607 v1(-25.63,-30.607)
GP22/MB2_CS: CS2.1 J2.3 U1.29 | length 92.1
  Top Copper w0.2: J2.3@-34.925,-50.8 -33.02,-52.705 -24.524,-52.705 -23.518,-51.698 -23.518,-49.573 -12.685,-38.74 CS2.1@-9.175,-38.74 42.286,-38.74 45.192,-35.834 U1.29@45.192,-32.887
GP26/MB1_ADC: ADC1.1 J1.1 U1.31 | length 134.5
  Top Copper w0.2: J1.1@-40.005,-20.955 -42.037,-22.987 -42.037,-46.693 -38.88,-49.85 -38.88,-50.977 -36.625,-53.232 -20.612,-53.232 -18.815,-51.435 -18.815,-46.062 -12.631,-39.878 ADC1.1@37.592,-39.878 43.688,-39.878 47.244,-36.322 47.922,-36.322 50.272,-33.972 U1.31@50.272,-32.887
GP27/MB2_ADC: ADC2.1 J2.1 U1.32 | length 107.7
  Top Copper w0.2: v1(-18.415,-52.07) -18.161,-51.816 -18.161,-45.974 -13.227,-41.04 43.161,-41.04 44.636,-39.565 45.906,-39.565 49.276,-36.195 52.412,-36.195 52.812,-35.794 U1.32@52.812,-32.887
  Bottom Copper w0.2: J2.1@-40.005,-50.8 -37.211,-53.594 -19.939,-53.594 v1(-18.415,-52.07)
GP28/ADC2: ADC3.1 P1.2 U1.34 | length 14.6
  Top Copper w0.2: P1.2@48.26,-40.64 50.165,-38.735 ADC3.1@50.165,-36.83 55.034,-36.83 57.892,-33.972 U1.34@57.892,-32.887
LED_BA: LB1.1 R25A.2 U7.8 | length 10.1
  Top Copper w0.2: v1@2.54,-18.161 1.905,-18.161 ; R25A.2@2.667,-20.19 2.617,-20.19 2.387,-19.96 2.387,-19.91 2.286,-19.809 2.286,-18.542 1.905,-18.161 ; U7.8@3.16,-12.685 2.53,-12.685 1.905,-13.31 1.905,-18.161
  Bottom Copper w0.2: v1(2.667,-18.161) 2.921,-18.415 LB1.1@2.921,-18.796
LED_BB: LB2.1 R25B.2 U7.15 | length 10.6
  Top Copper w0.2: U7.15@6.335,-11.91 8.001,-13.576 8.001,-18.034 ; v1(7.493,-18.415) 7.509,-18.415 7.89,-18.034 8.001,-18.034 ; R25B.2@7.874,-20.19 7.874,-18.923 8.001,-18.796 8.001,-18.034
  Bottom Copper w0.2: v1(7.493,-18.415) 7.874,-18.034 LB2.1@8.255,-18.034
LED_BC: LB3.1 R25C.2 U7.22 | length 20.7
  Top Copper w0.2: U7.22@5.56,-8.735 5.56,-8.51 7.692,-8.51 8.077,-8.125 11.046,-8.125 12.7,-9.779 12.7,-19.05 ; v1(11.938,-19.177) 12.019,-19.177 12.146,-19.05 12.7,-19.05 ; R25C.2@12.573,-20.125 12.7,-19.998 12.7,-19.05
  Bottom Copper w0.2: v1(11.938,-19.177) 12.019,-19.177 12.145,-19.052 12.19,-19.052 12.496,-18.746 12.777,-18.746 LB3.1@12.954,-18.923
LED_GA: LG1.1 R24A.2 U7.7 | length 10.3
  Top Copper w0.2: v1(0.635,-18.288) 0.716,-18.288 0.97,-18.034 1.143,-18.034 ; R24A.2@1.016,-20.19 1.143,-20.063 1.143,-18.034 ; U7.7@2.385,-11.91 2.06,-11.91 1.143,-12.827 1.143,-18.034
  Bottom Copper w0.2: LG1.1@0.381,-18.796 0.381,-18.623 0.635,-18.369 v1(0.635,-18.288)
LED_GB: LG2.1 R24B.2 U7.14 | length 10.5
  Top Copper w0.2: U7.14@5.56,-12.685 5.56,-12.951 5.96,-12.951 7.316,-14.307 7.316,-17.815 7.157,-17.973 ; R24B.2@6.223,-20.19 6.223,-18.923 6.943,-18.203 6.943,-18.187 7.157,-17.973 ; v1@6.223,-18.161 6.35,-18.161 6.538,-17.973 7.157,-17.973
  Bottom Copper w0.2: LG2.1@5.906,-18.479 v1(6.287,-18.098)
LED_GC: LG3.1 R24C.2 U7.21 | length 17.8
  Top Copper w0.2: U7.21@6.335,-9.51 7.258,-9.51 8.243,-8.525 10.684,-8.525 11.176,-9.017 11.176,-18.415 ; R24C.2@11.176,-20.125 11.176,-19.05 11.176,-18.415 ; v1(11.557,-18.034) 11.176,-18.415
  Bottom Copper w0.2: v1(11.557,-18.034) 11.557,-18.018 11.938,-17.637 LG3.1@11.938,-17.526
LED_RA: LR1.1 R23A.2 U7.6 | length 12.1
  Top Copper w0.2: v1(-1.397,-18.05) -1.368,-18.05 -1.13,-18.288 -0.508,-18.288 ; R23A.2@-0.635,-20.19 -0.608,-20.163 -0.608,-18.388 -0.508,-18.288 ; U7.6@2.385,-11.51 1.894,-11.51 0.635,-12.769 0.635,-17.145 -0.508,-18.288
  Bottom Copper w0.2: LR1.1@-1.778,-18.796 -1.778,-18.431 v1(-1.397,-18.05)